# EAGLE board DzielnikNapiecia (EAGLE 7.6.0)

Size 73.58 x 63.39 mm. Coordinates in mm from the lower left corner, seen from the top.
Outline: 0,0 56.82,0 56.82,53.33 0,53.33 0,0
Copper layers (1*16): Top 0.035mm / dielectric 1.5mm / Bottom 0.035mm
Design rules "default": minimum track width 10mil, minimum drill 24mil, track to track 8mil, track to pad 8mil, pad to pad 8mil, via to via 8mil, smd to smd 8mil, copper to edge 40mil, drill to drill 8mil, minimum pad ring 10mil, minimum via ring 8mil, stop-mask expansion 4mil, vias tented up to drill 0mil, thermal gap 10mil

## Footprints (pad centres in the part's own frame; a part is rotated, then mirrored left to right if it is on the bottom)
LED5MM = drill 0.813 octagon: A -1.27,0; K 1.27,0
PHOTORESISTOR-2.54 = drill 1 pad 1.5: P$1 -1.27,0; P$2 1.27,0
0207/10 = drill 0.813 octagon: 1 -5.08,0; 2 5.08,0
ARDUINO_UNO = drill 1.016 pad 1.88: 0 63.5,50.8; 1 60.96,50.8; 2 58.42,50.8; 3 55.88,50.8; 3.3V 35.56,2.54; 4 53.34,50.8; 5 50.8,50.8; 5V 38.1,2.54; 6 48.26,50.8; 7 45.72,50.8; 8 41.656,50.8; 9 39.116,50.8; 10 36.576,50.8; 11 34.036,50.8; 12 31.496,50.8; 13 28.956,50.8; A0 50.8,2.54; A1 53.34,2.54; A2 55.88,2.54; A3 58.42,2.54; A4 60.96,2.54; A5 63.5,2.54; AREF 23.876,50.8; GND 26.416,50.8; GND. 43.18,2.54; GND.. 40.64,2.54; I/OREF 30.48,2.54; N/C 27.94,2.54; RESET 33.02,2.54; SCL 18.796,50.8; SDA 21.336,50.8; VIN 45.72,2.54 | hole 3.2: 66.04,7.62; 66.04,35.56; 15.24,50.8; 13.97,2.54

## Placement (x,y rotation side)
DDiode2  [LED5MM]  5,60.88 0 top
DDiode3  [LED5MM]  5,111.68 0 top  (outside the outline)
DDiode4  [LED5MM]  5,86.28 0 top  (outside the outline)
DDiode11  [LED5MM]  5,22.78 0 top
RPhotoresistor  [PHOTORESISTOR-2.54]  5,48.18 0 top
RResistor  100k‎Ω  [0207/10]  5,137.08 0 top  (outside the outline)
RResistor1  100k‎Ω  [0207/10]  5,35.48 0 top
RResistor3  100k‎Ω  [0207/10]  5,124.38 0 top  (outside the outline)
RResistor4  100k‎Ω  [0207/10]  5,98.98 0 top  (outside the outline)
RResistor21  100k‎Ω  [0207/10]  5,73.58 0 top  (outside the outline)
UArduino  [ARDUINO_UNO]  5,10.08 0 top

## Library data of the parts
DDiode2-DDiode4 DDiode11 RPhotoresistor RResistor RResistor1 RResistor3 RResistor4 RResistor21 UArduino = AUTODESK_CIRCUITS_BREADBOARD

## Nets
N$1: DDiode11.A RResistor1.2
N$2: RResistor1.1 UArduino.8
N$3: DDiode2.A RResistor21.2
N$4: RResistor21.1 UArduino.9
N$5: DDiode4.A RResistor4.2
N$6: RResistor4.1 UArduino.11
N$7: DDiode3.A RResistor3.2
N$8: RResistor3.1 UArduino.10
N$9: DDiode2.K DDiode3.K DDiode4.K DDiode11.K RResistor.2 UArduino.GND.
N$10: RPhotoresistor.P$2 RResistor.1 UArduino.A5
N$11: RPhotoresistor.P$1 UArduino.5V

## Tracks (layer width: path | path; a pad name or v marks a point on that pad's centre or on a via)
N$1  (1 unrouted)
N$2  (1 unrouted)
N$3  (1 unrouted)
N$4  (1 unrouted)
N$5  (1 unrouted)
N$6  (1 unrouted)
N$7  (1 unrouted)
N$8  (1 unrouted)
N$9  (5 unrouted)
N$10  (2 unrouted)
N$11  (1 unrouted)